# Altium PCB IMU.PcbDoc
Units mil, origin at the board's own origin, x right, y up, seen from the top; angles counter-clockwise.
Board outline 1287.4 x 2086.61 mil, 2 copper layers (Top Layer, Bottom Layer); 59 components, 83 nets, 241 pads, 231 vias.
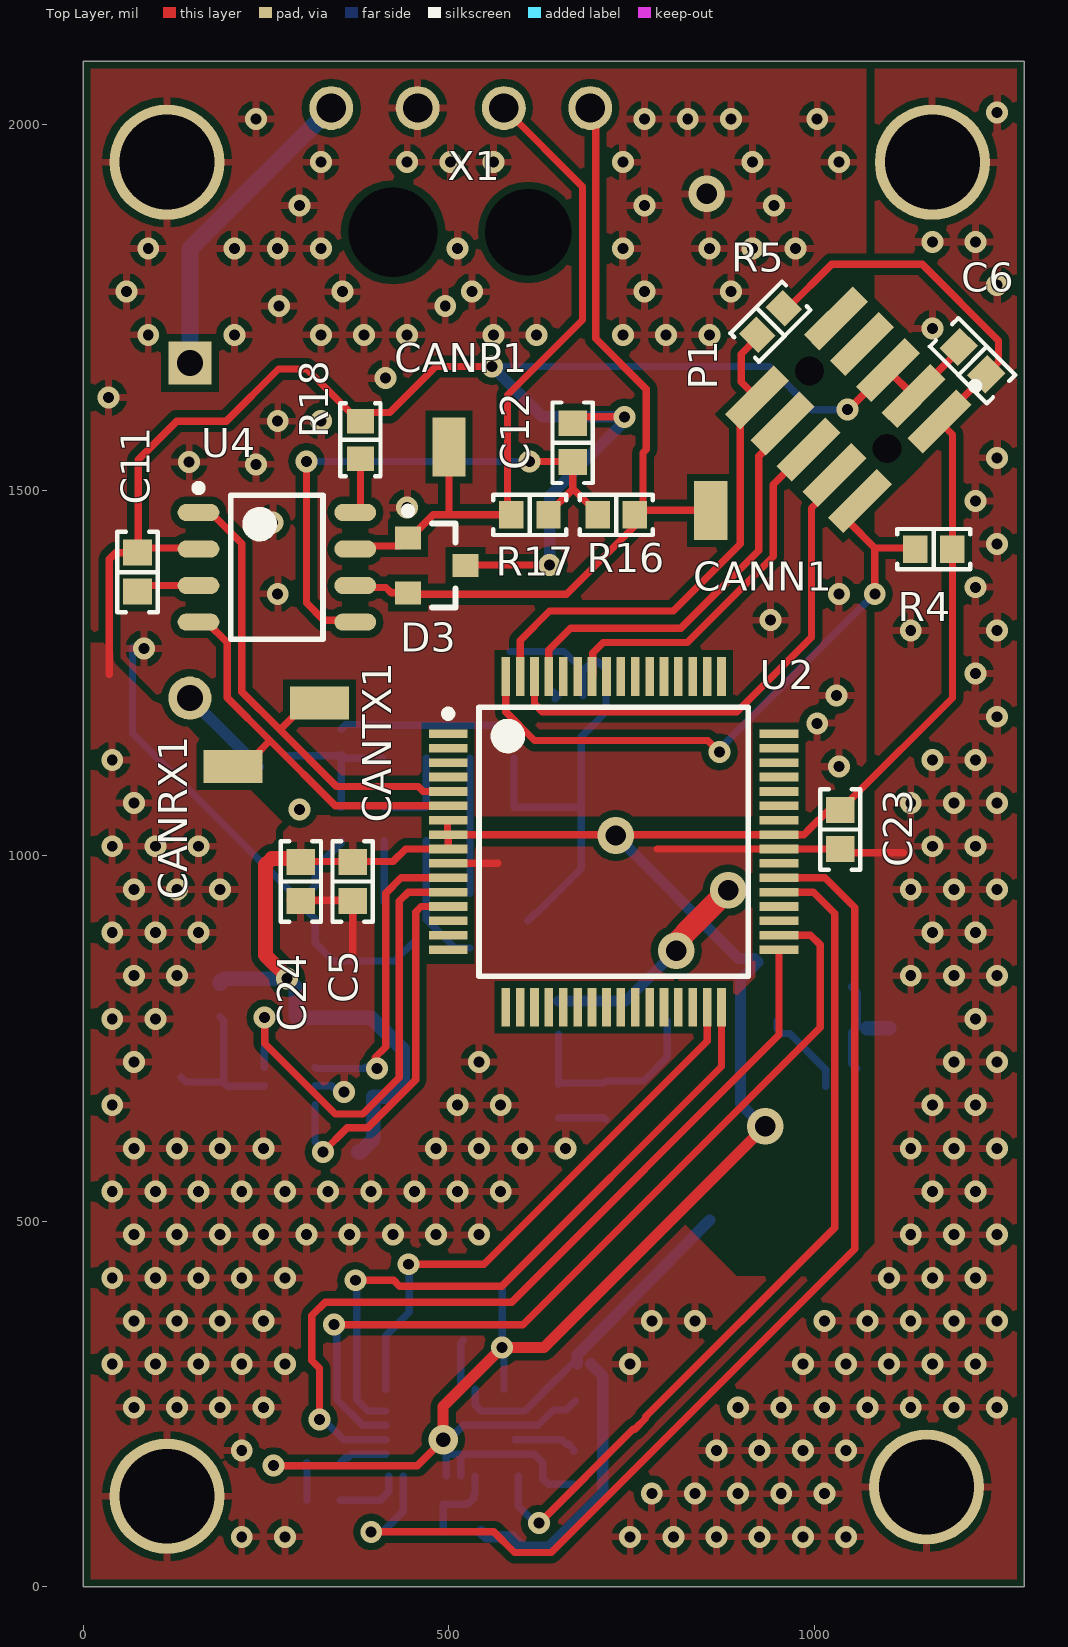
[diagram p0: Top Layer view]
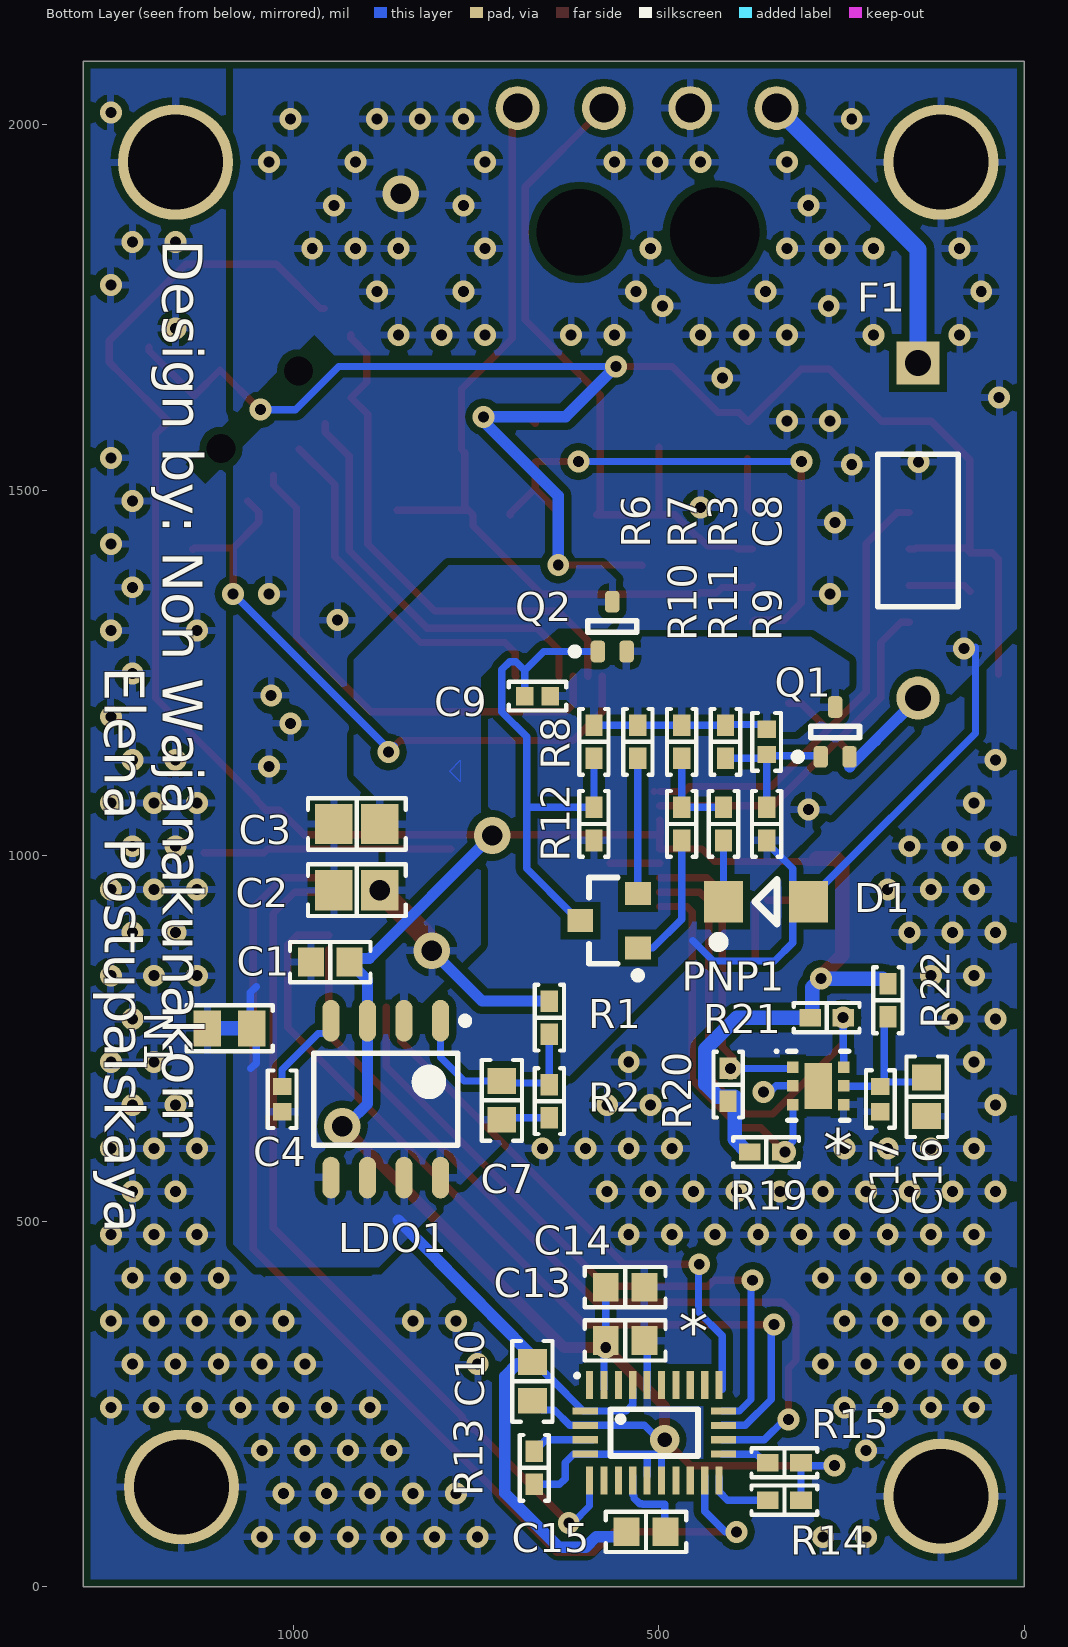
[diagram p1: Bottom Layer view, seen from below]

## Layer stack, top to bottom
Top Solder: solder mask 0.4, Solder Resist, Dk 3.5
Top Layer: signal copper 1.4
Dielectric 1: dielectric 12.6, FR-4, Dk 4.8
Bottom Layer: signal copper 1.4
Bottom Solder: solder mask 0.4, Solder Resist, Dk 3.5

## Board outline
1287.4,0 1287.4,2086.61 0,2086.61 0,0

## Design rules (kind name [scope] priority, off if disabled: settings)
BoardOutlineClearance [All] p1: gap=10 ignorepadtopadclearanceinfootprint=FALSE
Clearance [All] p1: gap=10 ignorepadtopadclearanceinfootprint=FALSE except(7.5: SMDPad-SMDPad; 8: Arc-Arc Arc-Track Arc-SMDPad Track-Track Track-SMDPad)
HoleSize [All] p1: absolutevalues=TRUE maxlimit=100 minlimit=10 maxpercent=80.000 minpercent=20.000
PolygonConnect [All] p1: connectstyle=Relief reliefconductorwidth=10 reliefentries=4 polygonreliefangle="90 Angle" airgapwidth=10
RoutingVias [All] p1: holewidth=15 width=30 viastyle="Through Hole" minholewidth=10 minwidth=20 maxholewidth=45 maxwidth=60
SilkToSilkClearance [All] p1: silktosilkclearance=0
SolderMaskExpansion [All] p1: expansion=4
Width [All] p1: maxlimit=50 minlimit=10 preferedwidth=10
28 further rules are at their usual default settings.

## Classes and differential pairs
component class U_MCU_MKE185F512VLH16: C5 C6 C23 C24 CANRX1 CANTX1 P1 R4 R5 U2
component class U_IC_BNO080: * C10 C13 C14 C15 R13 R14 R15
component class U_FUSE_RVP_OVP14V7: C8 C9 D1 F1 PNP1 Q1 Q2 R3 R6 R7 R8 R9 R10 R11 R12
component class U_CAN_Tranceiver: C11 C12 CANN1 CANP1 D3 R16 R17 R18 U4
component class U_3V3_LDO: C1 C2 C3 C4 C7 LDO1 R1 R2
component class IMU_BLOCK: * C16 C17 N1 R19 R20 R21 R22 X1

## Components (designator, comment, footprint, x,y, rotation, side; value= is the part's Value field where it differs from the comment)
* "TMP117" WSON-6 282.03,685.04 r180 bottom
* "BNO080" BNO080 506.36,210.63 r180 bottom value=Null
C1 "Capacitor MLCC 2.2uf 16V CAP 0603/1608" "CAP 0603/1608" 949.8,854.33 r180 bottom value=2.2uf
C2 "Capacitor MLCC 22uf 50V CAP 0805/2012" "CAP 0805/2012" 913.39,952.76 r180 bottom value=22uf
C3 "Capacitor MLCC 22uf 50V CAP 0805/2012" "CAP 0805/2012" 913.39,1043.31 r180 bottom value=22uf
C4 "Capacitor MLCC 470pf 25V CAP 0402/1005" "CAP 0402/1005" 1015.73,666.77 r90 bottom value=470pf
C5 "Capacitor MLCC 0.10uf 25V CAP 0603/1608" "CAP 0603/1608" 368.38,964.57 r90 top value=0.10uf
C6 "Capacitor MLCC 0.10uf 16V CAP 0603/1608" "CAP 0603/1608" 1216.54,1677.17 r315 top value=0.10uf
C7 "Capacitor MLCC 0.10uf 16V CAP 0603/1608" "CAP 0603/1608" 715,665.2 r90 bottom value=0.10uf
C8 "Capacitor MLCC 0.010uf 25V CAP 0402/1005" "CAP 0402/1005" 352.61,1155.71 r90 bottom value=0.010uf
C9 "Capacitor MLCC 0.010uf 25V CAP 0402/1005" "CAP 0402/1005" 666.26,1218.39 r180 bottom value=0.010uf
C10 "Capacitor MLCC 0.10uf 16V CAP 0603/1608" "CAP 0603/1608" 673.23,280.68 r270 bottom value=0.10uf
C11 "Capacitor MLCC 0.10uf 50V CAP 0603/1608" "CAP 0603/1608" 73.94,1387.96 r270 top value=0.10uf
C12 "Capacitor MLCC 4700pf 50V CAP 0603/1608" "CAP 0603/1608" 669.29,1565.01 r270 top value=4700pf
C13 "Capacitor MLCC 0.010uf 16V CAP 0603/1608" "CAP 0603/1608" 546.26,336.78 r0 bottom value=0.010uf
C14 "Capacitor MLCC 0.10uf 16V CAP 0603/1608" "CAP 0603/1608" 546.26,409.62 r0 bottom value=0.10uf
C15 "Capacitor MLCC 0.10uf 16V CAP 0603/1608" "CAP 0603/1608" 517.74,74.8 r180 bottom value=0.10uf
C16 "Capacitor MLCC 0.10uf 16V CAP 0603/1608" "CAP 0603/1608" 133.86,670.12 r90 bottom value=0.10uf
C17 "Capacitor MLCC 0.010uf 25V CAP 0402/1005" "CAP 0402/1005" 197.02,666.93 r90 bottom value=0.010uf
C23 "Capacitor MLCC 100pf 25V CAP 0603/1608" "CAP 0603/1608" 1035.43,1035.7 r90 top value=100pf
C24 "Capacitor MLCC 0.10uf 25V CAP 0603/1608" "CAP 0603/1608" 297.34,964.57 r90 top value=0.10uf
CANN1 "RCU-0C" RCU-0C 858.27,1472.44 r180 top (schematic designator TEST_CANN1)
CANP1 "RCU-0C" RCU-0C 500,1559.06 r180 top (schematic designator TEST_CANP1)
CANRX1 "RCU-0C" RCU-0C 204.72,1122.05 r90 top (schematic designator TEST_CANRX1)
CANTX1 "RCU-0C" RCU-0C 322.83,1208.66 r90 top (schematic designator TEST_CANTX1)
D1 "DDZ9701-7" SOD123F 353.61,936.92 r0 bottom value=14Vz
D3 "NUP2105LT1" "SOT-23 (TO-236)" 483.31,1396.94 r0 top value=TVS_24V
F1 "1A" PIN-W2/E2.8 145.58,1444.88 r270 bottom
LDO1 "MIC5209-3.3YM" SOIC-8 873.83,666.77 r270 bottom value="3.3V 500mA"
N1 "Net_Tie" Net_Tie 1087.49,763.78 r0 bottom
P1 "5103309-1" HDR2X5_SMT 1046.29,1610.24 r135 top value=CONN
PNP1 "2SB815-6-TB-E_PNP" SOT23-3 568.31,910.98 r0 bottom value="15V 0.7A"
Q1 "CMUDM8005 TR PFET" "CMUDM8005 TR SOT523" 258.94,1169.33 r90 bottom value=P_Channel
Q2 "CMUDM8005 TR PFET" "CMUDM8005 TR SOT523" 563.94,1313.39 r90 bottom value=P_Channel
R1 "Resistor 100k 0402 1/10W 1%" "RES 0402/1005" 650,778.31 r90 bottom value=100k
R2 "Resistor 100k 0402 1/10W 1%" "RES 0402/1005" 650,664.13 r90 bottom value=100k
R3 "Resistor 330k 0402 1/10W 1%" "RES 0402/1005" 408.94,1155.75 r90 bottom value=330k
R4 "Resistor 10k 0603 1/10W 1%" "RES 0603/1608" 1163.39,1419.37 r0 top value=10k
R5 "Resistor 10k 0603 1/10W 5%" "RES 0603/1608" 939.99,1730.62 r45 top value=10k
R6 "Resistor 300 0402 1/10W 1%" "RES 0402/1005" 528.94,1155.75 r90 bottom value=300
R7 "Resistor 100k 0402 1/10W 1%" "RES 0402/1005" 468.94,1155.75 r90 bottom value=100k
R8 "Resistor 330k 0402 1/10W 1%" "RES 0402/1005" 588.94,1155.75 r90 bottom value=330k
R9 "Resistor 100k 0402 1/10W 1%" "RES 0402/1005" 352.61,1043.39 r90 bottom value=100k
R10 "Resistor 300 0402 1/10W 1%" "RES 0402/1005" 468.94,1043.39 r90 bottom value=300
R11 "Resistor 300 0402 1/10W 1%" "RES 0402/1005" 411.68,1043.39 r90 bottom value=300
R12 "Resistor 100k 0402 1/10W 1%" "RES 0402/1005" 588.94,1043.39 r90 bottom value=100k
R13 "Resistor 10k 0402 1/10W 1%" "RES 0402/1005" 670.6,162.4 r270 bottom value=10k
R14 "Resistor 2.2k 0402 1/10W 1%" "RES 0402/1005" 328.33,118.11 r180 bottom value=2.2k
R15 "Resistor 2.2k 0402 1/10W 1%" "RES 0402/1005" 328.33,169.29 r180 bottom value=2.2k
R16 "Resistor 62 0603 1/10W 5%" "RES 0603/1608" 728.94,1466.42 r180 top value=62
R17 "Resistor 62 0603 1/10W 5%" "RES 0603/1608" 610.66,1466.42 r180 top value=62
R18 "Resistor 100 0603 1/10W 10%" "RES 0603/1608" 378.94,1568.95 r270 top value=100
R19 "Resistor 2.2k 0402 1/10W 1%" "RES 0402/1005" 353.35,594.49 r0 bottom value=2.2k
R20 "Resistor 2.2k 0402 1/10W 1%" "RES 0402/1005" 405.51,686.62 r270 bottom value=2.2k
R21 "Resistor 2.2k 0402 1/10W 1%" "RES 0402/1005" 270.53,778.3 r0 bottom value=2.2k
R22 "Resistor 300 0402 1/10W 1%" "RES 0402/1005" 186.71,802.17 r90 bottom value=300
U2 "" TQFP64 725.38,1018.97 r0 top
U4 "MCP2561 CAN Transceiver" SOIC-8 264.64,1394.54 r0 top value=CAN/UART
X1 "43650-0402" Molex_43650_0402 339.04,2022.96 r270 top value=CONN

## Footprints (in the part's own frame and the unit in brackets; to place one, negate y for a bottom-side part, rotate by r counter-clockwise, add the part's x,y. Pads: shape width x height; smd on the part's side, far side on the other; paste and mask are expansions set on the pad)
BNO080 [mm]
  rect 0.25x0.975 smd: 1(-2.25,1.658) 6(-2.25,-1.66) 7(-1.75,-1.66) 8(-1.25,-1.66) 9(-0.75,-1.66) 10(-0.25,-1.66) 11(0.25,-1.66) 12(0.75,-1.66) 13(1.25,-1.66) 14(1.75,-1.66) 15(2.25,-1.66) 20(2.25,1.658) 21(1.75,1.658) 22(1.25,1.658) 23(0.75,1.658) 24(0.25,1.658) 25(-0.25,1.658) 26(-0.75,1.658) 27(-1.25,1.658) 28(-1.75,1.658)
  rect 0.875x0.25 smd: 2(-2.4,0.75) 3(-2.4,0.25) 4(-2.4,-0.25) 5(-2.4,-0.75) 16(2.4,-0.75) 17(2.4,-0.25) 18(2.4,0.25) 19(2.4,0.75)
  silkscreen extent -2.7,-0.81 1.52,1.99, body extent -2.6,-1.9 2.6,1.9, height 1.18
"CAP 0402/1005" [mm] "Chip Capacitor, 2-Leads, Body 1.02x0.51mm, IPC Medium Density"
  rect 0.6x0.64 smd: 1(-0.44,0) 2(0.44,0)
  silkscreen extent -1,-0.5 1,0.5, body extent -0.5,-0.26 0.5,0.26, height 0.52
"CAP 0603/1608" [mm] "Chip Capacitor, 2-Leads, Body 1.60x0.80mm, IPC Medium Density"
  rect 0.9x1 smd: 1(-0.675,0) 2(0.675,0)
  silkscreen extent -1.4,-0.7 1.4,0.7, body extent -0.8,-0.41 0.8,0.41, height 0.82
"CAP 0805/2012" [mm] "Chip Capacitor, 2-Leads, Body 2.00x1.20mm, IPC Medium Density"
  rect 1.3x1.4 smd: 1(-0.8,0) 2(0.8,0)
  silkscreen extent -1.7,-0.9 1.7,0.9, body extent -1,-0.64 1,0.64, height 1.26
"CMUDM8005 TR SOT523" [mm] "SOT523, 3-Leads, Body 1.60x1.60mm (avg), Pitch 1.00mm, IPC Medium Density"
  rrect50% 0.75x0.5 smd: 1(-0.865,0.5) 2(-0.865,-0.5) 3(0.865,0)
  silkscreen extent -0.99,-0.85 0.2,1.43, body extent -0.49,-0.85 0.49,0.85, height 0.78
HDR2X5_SMT [mm] "Header, 10-Leads, Body 3.43x6.35mm, Pitch 1.27mm"
  rect 0.76x2.4 smd: 1(-2.54,-1.95) 2(-2.54,1.95) 3(-1.27,-1.95) 4(-1.27,1.95) 5(0,-1.95) 6(0,1.95) 7(1.27,-1.95) 8(1.27,1.95) 9(2.54,-1.95) 10(2.54,1.95)
  round 0 hole 1 unplated: MH1(-1.905,0) MH2(1.905,0)
  silkscreen extent -2.66,-3.82 -2.42,-3.58, body extent -3.18,-1.72 3.18,1.72, height 4.55
Molex_43650_0402 [mm]
  round 1.524 hole 1.02: 1(0,0) 2(0,3) 3(0,6) 4(0,9)
  round 0 hole 3: 5(4.32,6.85)
  round 0 hole 3.1: 5(4.32,2.15)
  body extent -1.15,-3.32 8.75,12.33, height 5.57
Net_Tie [mm] "Chip Resistor, 2-Leads, Body 2.00x1.25mm, IPC High Density"
  rect 0.95x1.25 smd: 1(-0.775,0) 2(0.775,0)
  Top Layer lines w0.5: -0.381,0 0.381,0
  silkscreen extent -1.5,-0.8 1.5,0.8
PIN-W2/E2.8 [mm] "Thru-Hole; 2 Leads"
  rect 1.5x1.5 hole 0.9: 1(-5.825,0)
  round 1.5 hole 0.9: 2(5.825,0)
  silkscreen extent -2.65,-1.4 2.65,1.4
RCU-0C [mm]
  rect 1.15x2.05 smd: 1(0,0)
  body extent -0.6,-0.77 0.6,0.82, height 1.16
"RES 0402/1005" [mm] "Chip Resistor, 2-Leads, Body 1.0x0.5mm, IPC Medium Density"
  rect 0.75x0.6 smd: 1(-0.575,0) 2(0.575,0)
  silkscreen extent -1.14,-0.51 1.14,0.51, body extent -0.5,-0.25 0.5,0.25, height 0.35
"RES 0603/1608" [mm] "Chip Resistor, 2-Leads, Body 1.60x0.80mm, IPC Medium Density"
  rect 0.85x0.95 smd: 1(-0.65,0) 2(0.65,0)
  silkscreen extent -1.27,-0.7 1.27,0.7, body extent -0.8,-0.4 0.8,0.4, height 0.45
SOD123F [mm] "SODFL, 2-Leads, Body 1.80x3.50mm, IPC Low Density"
  rect 1.35x1.45 smd: 1(-1.475,0) 2(1.475,0)
  silkscreen extent -0.38,-0.76 1.75,1.5, body extent -1.75,-0.95 1.75,0.95, height 1.15
SOIC-8 [mm] "SOIC, 8-Leads, Body 4.90x3.90mm, Pitch 1.27mm, IPC Medium Density"
  oval 1.45x0.6 smd: 1(-2.725,1.905) 2(-2.725,0.635) 3(-2.725,-0.635) 4(-2.725,-1.905) 5(2.725,-1.905) 6(2.725,-0.635) 7(2.725,0.635) 8(2.725,1.905)
  silkscreen extent -2.85,-2.5 1.6,2.88, body extent -3,-2.5 3,2.5, height 1.75
SOT23-3 [mm] "SOT23, 3-Leads, Body 2.92x2.37mm, Pitch 0.95mm, IPC Medium Density, NUP2105L"
  rect 0.9x0.8 smd: 1(-1,0.95) 2(-1,-0.95) 3(1,0)
  silkscreen extent -1.12,-1.5 0.7,2.02, body extent -0.7,-1.52 0.7,1.52, height 1.11
"SOT-23 (TO-236)" [mm]
  rect 0.9x0.8 smd: 1(-1,0.95) 2(-1,-0.95) 3(1,0)
  silkscreen extent -1.12,-1.46 0.65,2.02, body extent -0.65,-1.46 0.65,1.46, height 1.11
TQFP64 [mm] "TSQFP, 64-Leads, Body 10.00x10.00mm, Pitch 0.50mm, IPC Medium Density, MKE18F512VLH16"
  rect 1.35x0.3 smd: 1(-5.75,3.75) 2(-5.75,3.25) 3(-5.75,2.75) 4(-5.75,2.25) 5(-5.75,1.75) 6(-5.75,1.25) 7(-5.75,0.75) 8(-5.75,0.25) 9(-5.75,-0.25) 10(-5.75,-0.75) 11(-5.75,-1.25) 12(-5.75,-1.75) 13(-5.75,-2.25) 14(-5.75,-2.75) 15(-5.75,-3.25) 16(-5.75,-3.75) 33(5.75,-3.75) 34(5.75,-3.25) 35(5.75,-2.75) 36(5.75,-2.25) 37(5.75,-1.75) 38(5.75,-1.25) 39(5.75,-0.75) 40(5.75,-0.25) 41(5.75,0.25) 42(5.75,0.75) 43(5.75,1.25) 44(5.75,1.75) 45(5.75,2.25) 46(5.75,2.75) 47(5.75,3.25) 48(5.75,3.75)
  rect 0.3x1.35 smd: 17(-3.75,-5.75) 18(-3.25,-5.75) 19(-2.75,-5.75) 20(-2.25,-5.75) 21(-1.75,-5.75) 22(-1.25,-5.75) 23(-0.75,-5.75) 24(-0.25,-5.75) 25(0.25,-5.75) 26(0.75,-5.75) 27(1.25,-5.75) 28(1.75,-5.75) 29(2.25,-5.75) 30(2.75,-5.75) 31(3.25,-5.75) 32(3.75,-5.75) 49(3.75,5.75) 50(3.25,5.75) 51(2.75,5.75) 52(2.25,5.75) 53(1.75,5.75) 54(1.25,5.75) 55(0.75,5.75) 56(0.25,5.75) 57(-0.25,5.75) 58(-0.75,5.75) 59(-1.25,5.75) 60(-1.75,5.75) 61(-2.25,5.75) 62(-2.75,5.75) 63(-3.25,5.75) 64(-3.75,5.75)
  silkscreen extent -5.87,-4.67 4.67,4.68, body extent -5,-5 5,5, height 1.6
WSON-6 [mm] "WSON, 6-Leads, Body 2.00x2.00mm, Pitch 0.65mm, Thermal Pad 1.60x0.96mm, IPC Medium Density"
  rect 0.4x0.4 smd: 1(-0.88,0.65) 2(-0.88,0) 3(-0.88,-0.65) 4(0.88,-0.65) 5(0.88,0) 6(0.88,0.65)
  rect 0.96x1.6 smd: 7(0,0)
  silkscreen extent -1.5,-1.2 1.05,1.25, body extent -1.05,-1.05 1.05,1.05, height 0.8

## Part data
*: library part 5, "Temperature Sensor Digital, Local -55°C ~ 150°C 16 b 6-WSON (2x2)", Manufacturer_id=1, MfrPartNo=TMP117MAIDRVT, Package=WSON-6, Created_By="Non Wajanakunakorn", Drawer_id=1, idADC=5, Link=https://www.digikey.com/product-detail/en/texas-instruments/TMP117MAIDRVT/296-52215-1-ND/9749243
*: library part 33, "Accelerometer, Gyroscope, Magnetometer, 9 Axis Sensor", Manufacturer_id=1, Package=28-TFLGA, ComponentLink1Description=datasheet, ComponentLink1URL=https://cdn.sparkfun.com/assets/1/3/4/5/9/BNO080_Datasheet_v1.3.pdf, Created_By=Null, Data_Rate=Null, Drawer_id=1, idIC_Misc=33, MfrPartNo=BNO080, Name=BNO080, Num_Circuits=1, Protocol=Null, Supplier1=Digi-Key, Supplier1PartNo=https://www.digikey.com/product-detail/en/hillcrest-laboratories-inc/BNO080/1888-1000-1-ND/7917169, Type="9dof IC Sensor", Updated_By=Null, Vin(Max)=3.6V, Vin(Min)="1.7V for IO, 2.4V for sensors"
C1: library part 231, Dielectric=Ceramic, Manufacturer_id=1, Package="CAP 0603/1608", Voltage_Rating=16V, Created_By="Nick Mah", Created_Date=10/20/2018, Drawer_id=1, idCapacitor=231, Name="Cap_2.2uf_16V_CAP 0603/1608"
C2 C3: library part 1077, Dielectric=Ceramic, Manufacturer_id=1, Package="CAP 0805/2012", Voltage_Rating=50V, Created_By="Nick Mah", Created_Date=10/20/2018, Drawer_id=1, idCapacitor=1077, Name="Cap_22uf_50V_CAP 0805/2012"
C4: library part 425, Dielectric=Ceramic, Manufacturer_id=1, Package="CAP 0402/1005", Voltage_Rating=25V, Created_By="Nick Mah", Created_Date=10/20/2018, Drawer_id=1, idCapacitor=425, Name="Cap_470pf_25V_CAP 0402/1005"
C5 C24: library part 583, Dielectric=Ceramic, Manufacturer_id=1, Package="CAP 0603/1608", Voltage_Rating=25V, Created_By="Nick Mah", Created_Date=10/20/2018, Drawer_id=1, idCapacitor=583, Name="Cap_0.10uf_25V_CAP 0603/1608"
C6 C7 C10 C14 C15 C16: library part 223, Dielectric=Ceramic, Manufacturer_id=1, Package="CAP 0603/1608", Voltage_Rating=16V, Created_By="Nick Mah", Created_Date=10/20/2018, Drawer_id=1, idCapacitor=223, Name="Cap_0.10uf_16V_CAP 0603/1608"
C8 C9 C17: library part 457, Dielectric=Ceramic, Manufacturer_id=1, Package="CAP 0402/1005", Voltage_Rating=25V, Created_By="Nick Mah", Created_Date=10/20/2018, Drawer_id=1, idCapacitor=457, Name="Cap_0.010uf_25V_CAP 0402/1005"
C11: library part 943, Dielectric=Ceramic, Manufacturer_id=1, Package="CAP 0603/1608", Voltage_Rating=50V, Created_By="Nick Mah", Created_Date=10/20/2018, Drawer_id=1, idCapacitor=943, Name="Cap_0.10uf_50V_CAP 0603/1608"
C12: library part 929, Dielectric=Ceramic, Manufacturer_id=1, Package="CAP 0603/1608", Voltage_Rating=50V, Created_By="Nick Mah", Created_Date=10/20/2018, Drawer_id=1, idCapacitor=929, Name="Cap_4700pf_50V_CAP 0603/1608"
C13: library part 217, Dielectric=Ceramic, Manufacturer_id=1, Package="CAP 0603/1608", Voltage_Rating=16V, Created_By="Nick Mah", Created_Date=10/20/2018, Drawer_id=1, idCapacitor=217, Name="Cap_0.010uf_16V_CAP 0603/1608"
C23: library part 529, Dielectric=Ceramic, Manufacturer_id=1, Package="CAP 0603/1608", Voltage_Rating=25V, Created_By="Nick Mah", Created_Date=10/20/2018, Drawer_id=1, idCapacitor=529, Name="Cap_100pf_25V_CAP 0603/1608"
CANN1 CANP1 CANRX1 CANTX1: library part 5, Manufacturer_id=1, Package=0603, ComponentLink1Description=Datasheet, ComponentLink1URL=https://www.te.com/commerce/DocumentDelivery/DDEController?Action=srchrtrv&DocNm=1773266&DocType=DS&DocLang=English, Drawer_id=1, idTable=5, Link=https://www.digikey.com/product-detail/en/te-connectivity-amp-connectors/RCU-0C/A106145CT-ND/3477802, MfrPartNo=RCU-0C, Name=RCU-0C_Test_Point
D1: library part 10, "Zener Diode 14V 500mW ±5% Surface Mount SOD-123", Manufacturer_id=8, Package=SOD-123, Power=500mW, Supplier1PartNo=DDZ9701-7DICT-ND, ComponentLink1Description=Datasheet, ComponentLink1URL=https://www.diodes.com/assets/Datasheets/ds30410.pdf, Drawer_id=1, idDiode=10, Link=https://www.digikey.com/product-detail/en/diodes-incorporated/DDZ9701-7/DDZ9701-7DICT-ND/3877402, MfrPartNo=DDZ9701-7, Name=DDZ9701, Num_Circuits=1, Supplier1=Digi-Key, Type=Zener
D3: library part 6, "ESD Protection Diode", Manufacturer_id=1, MfrPartNo=NUP2105LT1-ND, Package=SOT-23, Power=350W, Drawer_id=1, Ic=8A, idDiode=6, Link=https://www.digikey.com/product-detail/en/on-semiconductor/NUP2105LT1/NUP2105LT1-ND/1485000, Name=SOT-23_350W_Zener, Num_Circuits=1, Type=Zener
F1: library part 5, "Fuse", Manufacturer_id=1, MfrPartNo=1206L050/15YR, Created_By=Angel, Created_Date=10/27/2018, Drawer_id=1, I_hold=500mA, I_max=100A, I_trip=1A, idFuse=5, LatestRevisionDate=17-Jul-2002, LatestRevisionNote="Re-released for DXP Platform.", Link=https://www.digikey.com/product-detail/en/littelfuse-inc/1206L050-15YR/F3733CT-ND/2486168, Name="PTC Poly Fuse Resettable", PackageDescription="Thru-Hole; 2 Leads", PackageReference=PIN-W2/E2.8, Pd_Typ=600mW, Published=8-Jun-2000, Publisher="Altium Limited", V_max=15V
LDO1: library part 2, "IC REG LINEAR 3.3V 500MA 8SOIC", Current_Rating=500mA, Manufacturer_id=1, MfrPartNo=MIC5209-3.3YM-TRYM, Package=SOIC-8, Drawer_id=1, idPMIC_SW=2, Link=https://www.digikey.com/product-detail/en/microchip-technology/MIC5209-3.3YM-TR/MIC5209-3.3YM-CT-ND/7916551, Name="MIC5209-3.3YM 3.3V 500mA LDO", Num_Outputs=1, Output_Config=Fixed, Vin(Max)=16V, Vin(Min)=2.5V, Vout(Max)=3.3V, Vout(Min)=3.3v
N1 U2: library part 1, Drawer_id=1, Manufacturer_id=1
  N1: idFuse=3, idShunt=1, Name="Net Tie"
  U2: idMCU=1, Name="MKE18F512VLH16 MCU"
P1: library part 4, "2 row connector", Manufacturer_id=1, Voltage_Rating=None, ComponentLink1Description=Datasheet, Created_By=Aiku, Drawer_id=1, idConn=4, Link=https://www.digikey.com/product-detail/en/5103309-1/A33160-ND/1114898?utm_campaign=buynow&WT.z_cid=ref_octopart_dkc_buynow&utm_medium=aggregator&curr=usd&site=us&utm_source=octopart, MfrPartNo=5103309-1, Name=CONN_TE_2X5POS, Num_Contacts=10, Num_Rows=2, Pitch=2.54mm
PNP1: library part 8, "TRANS PNP 15V 0.7A CP", Manufacturer_id=1, MfrPartNo=2SB815-6-TB-E, Package="SMT 3-CP", Power=Null, Supplier1PartNo=2SB815-6-TB-EOSCT-ND, ComponentLink1Description=datasheet, ComponentLink1URL=https://www.onsemi.com/pub/Collateral/EN694-D.PDF, Created_By=None, Created_Date=3/2/2019, Drawer_id=1, hFE=200-400, Ic=0.7A, idBJT=8, Link=https://www.digikey.com/product-detail/en/on-semiconductor/2SB815-6-TB-E/2SB815-6-TB-EOSCT-ND/8538307, Name="2SB815-6-TB-E PNP", Num_Circuits=1, Supplier1=Digi-Key, Type=PNP, Updated_By=Null, Vce(Max)=15V
Q1 Q2: library part 13, "MOSFET P-CH 20V 650MA SOT523", Manufacturer_id=1, MfrPartNo="CMUDM8005 TR", Package=SOT-523, Power(Max)=300mW, Supplier1PartNo=CMUDM8005CT-ND, ComponentLink1Description=datasheet, ComponentLink1URL=https://my.centralsemi.com/get_document.php?cmp=1&mergetype=pd&mergepath=pd&pdf_id=CMUDM8005.PDF, Created_By=Null, Created_Date=3/2/2019, Drawer_id=1, Id=650mA, idFETs=13, Link=https://www.digikey.com/product-detail/en/central-semiconductor-corp/CMUDM8005-TR/CMUDM8005CT-ND/5324590, Name="CMUDM8005 TR PFET", Num_Circuits=1, Rds_On=360m, Supplier1=Digi-Key, Updated_By=Null, Vdss=20V, Vgs(Max)=8V, Vgs(typ)=Null
R1 R2 R7 R9 R12: library part 121, Manufacturer_id=1, Package=0402, Power=1/10W, Tolerance=1%, ComponentLink1Description=Datasheet, Created_By="Nick Mah", Created_Date=2018-10-20, Drawer_id=1, idResistor=121, Name=Res_100k_0402_1/10W_1%, Supplier 1=Digi-Key
R3 R8: library part 133, Manufacturer_id=1, Package=0402, Power=1/10W, Tolerance=1%, ComponentLink1Description=Datasheet, Created_By="Nick Mah", Created_Date=2018-10-20, Drawer_id=1, idResistor=133, Name=Res_330k_0402_1/10W_1%, Supplier 1=Digi-Key
R4: library part 313, Manufacturer_id=1, Package=0603, Power=1/10W, Tolerance=1%, ComponentLink1Description=Datasheet, Created_By="Nick Mah", Created_Date=2018-10-20, Drawer_id=1, idResistor=313, Name=Res_10k_0603_1/10W_1%, Supplier 1=Digi-Key
R5: library part 1393, Manufacturer_id=1, Package=0603, Power=1/10W, Tolerance=5%, ComponentLink1Description=Datasheet, Created_By="Nick Mah", Created_Date=2018-10-20, Drawer_id=1, idResistor=1393, Name=Res_10k_0603_1/10W_5%, Supplier 1=Digi-Key
R6 R10 R11 R22: library part 60, Manufacturer_id=1, Package=0402, Power=1/10W, Tolerance=1%, ComponentLink1Description=Datasheet, Created_By="Nick Mah", Created_Date=2018-10-20, Drawer_id=1, idResistor=60, Name=Res_300_0402_1/10W_1%, Supplier 1=Digi-Key
R13: library part 97, Manufacturer_id=1, Package=0402, Power=1/10W, Tolerance=1%, ComponentLink1Description=Datasheet, Created_By="Nick Mah", Created_Date=2018-10-20, Drawer_id=1, idResistor=97, Name=Res_10k_0402_1/10W_1%, Supplier 1=Digi-Key
R14 R15 R19 R20 R21: library part 81, Manufacturer_id=1, Package=0402, Power=1/10W, Tolerance=1%, ComponentLink1Description=Datasheet, Created_By="Nick Mah", Created_Date=2018-10-20, Drawer_id=1, idResistor=81, Name=Res_2.2k_0402_1/10W_1%, Supplier 1=Digi-Key
R16 R17: library part 1340, Manufacturer_id=1, Package=0603, Power=1/10W, Tolerance=5%, ComponentLink1Description=Datasheet, Created_By="Nick Mah", Created_Date=2018-10-20, Drawer_id=1, idResistor=1340, Name=Res_62_0603_1/10W_5%, Supplier 1=Digi-Key
R18: library part 2293, Manufacturer_id=1, Package=0603, Power=1/10W, Tolerance=10%, ComponentLink1Description=Datasheet, Created_By="Nick Mah", Created_Date=2018-10-20, Drawer_id=1, idResistor=2293, Name=Res_100_0603_1/10W_10%, Supplier 1=Digi-Key
U4: library part 5, Manufacturer_id=1, MfrPartNo=MCP2561, Package=SOIC-8, Created_By="Angel Delgado", Data_Rate=1Mbps, Drawer_id=1, idIC_Interface=5, Link=https://www.digikey.com/product-detail/en/microchip-technology/MCP2561T-E-SN/MCP2561T-E-SNCT-ND/5148846, Name="CAN Transceiver", Num_Circuits=1, Protocol=CAN, Type=Transceiver, Vin(Max)=5.5V, Vin(Min)=4.5V
X1: library part 6, Manufacturer_id=4, Package=Conn, Supplier1PartNo=WM11252-ND, Voltage_Rating=600V, ComponentLink1Description=Datasheet, ComponentLink1URL=https://www.mouser.com/datasheet/2/276/0436500402_PCB_HEADERS-148886.pdf, Created_By=Nick, Drawer_id=1, idConn=6, Link=https://www.digikey.com/product-detail/en/molex-llc/0436500402/WM11252-ND/3310554, MfrPartNo=43650-0402, Name="Molex 43650_0402", Num_Contacts=4, Num_Rows=1, Pitch=3mm, Supplier1=Digi-Key

## Free pads (board coordinates)
  round 157.48 hole 129.92: 1(114.17,123.48) 2(1153.54,136.13) 3(114.17,1948.82) 4(1161.42,1948.82)

## Via types
v1: diameter 30, hole 15, Top Layer to Bottom Layer, 225 vias
v2: diameter 50, hole 28, Top Layer to Bottom Layer, 5 vias
v3: diameter 40, hole 20, Top Layer to Bottom Layer, 1 vias

## Nets (pads, with @x,y where several pads share a name; then routed paths per layer and width w, separated by ;. In a path a pad name is that pad's centre, name@x,y a point inside that pad or via, vN(x,y) a via of type N, cw(c..) or ccw(c..) an arc to the next point about the centre after c; other vN are vias at no path point)
AGND: *.2@316.67,685.04 *.4@247.38,659.45 *.25 C5.1 C6.1 C11.1 C12.1 C13.1 C14.1 C16.1 C17.1 C23.1 C24.1 D3.3 N1.2 P1.3 P1.5 pad.1 pad.2 pad.4 R18.1 U2.10 U2.40 U4.2 | length 3049.3
  Top Layer w10: 35.43,1248.03 35.43,1405.65 44.32,1414.54 C11.1 C11.1@74.8,1415.4 ; U4.2 149.61,1419.54 148.2,1420.94 80.34,1420.94 C11.1@74.8,1415.4 ; C24.1@282.76,938.98 C5.1@351.03,938.98 ; 368.38,861.22 C5.1 ; U2.10 566.86,989.44 ; D3.3 523.37,1397.64 v1(637.79,1397.64) ; v1(559.06,1669.29) 481.99,1669.29 418.97,1606.27 390.67,1606.27 R18.1 376.97,1594.54 305.52,1665.98 266.9,1665.98 195.4,1594.49 127.53,1594.49 74.8,1541.76 C11.1@74.8,1415.4 ; C12.1 678.18,1600.47 v1(740.16,1600.47) ; 784.71,1009.12 U2.40 C23.1 1040.62,1003.94 1122.05,1003.94 ; v1(1045.33,1610.24) 1046.29,1610.24 P1.5 P1.3 1197.74,1690.98 C6.1
  Bottom Layer w10: *.2@316.67,685.04 317.07,684.65 317.46,685.04 339.79,685.04 348.35,676.48 v1(356.72,676.48) ; *.25@516.2,270 516.2,333.3 C13.1 ; v1(559.06,1669.29) 938.18,1669.29 997.23,1610.24 v1(1045.33,1610.24) ; v1@740.16,1594.49 v1(740.16,1600.47)
  Bottom Layer w15.75: v1(559.06,1669.29) 627.87,1600.47 v1(740.16,1600.47) ; v1(637.79,1397.64) 637.79,1492.12 v1@740.16,1594.49
  other v1: 216.54,67.99 275.59,67.99 748.03,67.99 807.09,67.99 866.14,67.99 925.2,67.99 984.25,67.99 1043.31,67.99 777.56,127.05 836.61,127.05 895.67,127.05 954.72,127.05 1013.78,127.05 216.54,186.1 866.14,186.1 925.2,186.1 984.25,186.1 1043.31,186.1 68.9,245.16 127.95,245.16 187.01,245.16 246.06,245.16 895.67,245.16 954.72,245.16 1013.78,245.16 1072.83,245.16 1131.89,245.16 1190.94,245.16 1250,245.16 39.37,304.21 98.43,304.21 157.48,304.21 216.54,304.21 275.59,304.21 748.03,304.21 984.25,304.21 1043.31,304.21 1102.36,304.21 1161.42,304.21 1220.47,304.21 68.9,363.27 127.95,363.27 187.01,363.27 246.06,363.27 777.56,363.27 836.61,363.27 1013.78,363.27 1072.83,363.27 1131.89,363.27 1190.94,363.27 1250,363.27 39.37,422.32 98.43,422.32 157.48,422.32 216.54,422.32 275.59,422.32 1102.36,422.32 1161.42,422.32 1220.47,422.32 68.9,481.38 127.95,481.38 187.01,481.38 246.06,481.38 305.12,481.38 364.17,481.38 423.23,481.38 482.28,481.38 541.34,481.38 1131.89,481.38 1190.94,481.38 1250,481.38 39.37,540.43 98.43,540.43 157.48,540.43 216.54,540.43 275.59,540.43 334.65,540.43 393.7,540.43 452.76,540.43 511.81,540.43 570.87,540.43 1161.42,540.43 1220.47,540.43 68.9,599.49 127.95,599.49 187.01,599.49 246.06,599.49 482.28,599.49 541.34,599.49 600.39,599.49 659.45,599.49 1131.89,599.49 1190.94,599.49 1250,599.49 39.37,658.54 511.81,658.54 570.87,658.54 1161.42,658.54 1220.47,658.54 68.9,717.6 541.34,717.6 1190.94,717.6 1250,717.6 39.37,776.65 98.43,776.65 1220.47,776.65 68.9,835.71 127.95,835.71 1131.89,835.71 1190.94,835.71 1250,835.71 39.37,894.76 98.43,894.76 157.48,894.76 1161.42,894.76 1220.47,894.76 68.9,953.82 127.95,953.82 187.01,953.82 1131.89,953.82 1190.94,953.82 1250,953.82 39.37,1012.87 98.43,1012.87 157.48,1012.87 1161.42,1012.87 1220.47,1012.87 68.9,1071.93 1131.89,1071.93 1190.94,1071.93 1250,1071.93 39.37,1130.98 1161.42,1130.98 1220.47,1130.98 1250,1190.04 1220.47,1249.09 1131.89,1308.15 1250,1308.15 1220.47,1367.2 1250,1426.26 1220.47,1485.31 1250,1544.37 1161.42,1721.54 1250,1780.59 1161.42,1839.65 1220.47,1839.65 1250,2016.81
ALERT: *.3@316.67,659.45 R19.1 U2.13 | length 517.4
  Top Layer w10: v1(327.76,594.49) 360.94,627.67 388.73,627.67 454.42,693.36 454.42,922.97 461.84,930.38 U2.13
  Bottom Layer w10: *.3@316.67,659.45 316.67,609.16 320.95,604.89 320.95,601.3 v1(327.76,594.49) R19.1
CAN_N: CANN1.1 D3.2 R16.1 U4.6 X1.4 | length 1142.5
  Top Layer w10: U4.6 374.53,1366.93 413.87,1366.93 421.26,1359.54 D3.2 445.84,1357.64 660.78,1357.64 754.53,1451.38 R16.1 ; X1.4 700.78,2015.55 700.78,1707.58 770.16,1638.2 770.16,1555.83 765.65,1551.33 765.65,1477.54 R16.1 ; CANN1.1 760.55,1472.44 R16.1
CAN_P: CANP1.1 D3.1 R17.2 U4.7 X1.3 | length 970.8
  Top Layer w10: U4.7 392.34,1419.54 396.39,1423.59 433.19,1423.59 D3.1 446.39,1434.34 478.46,1466.42 500,1466.42 ; CANP1.1 500,1466.42 ; X1.3 682.78,1915.44 682.78,1732.87 580.24,1630.33 580.24,1471.25 R17.2 500,1466.42
GND: *.2@600.85,240.16 *.26 C1.1 C2.1 C3.1 C4.1 C7.1 C10.1 C15.1 D1.1 LDO1.5 LDO1.6 LDO1.7 LDO1.8 N1.1 pad.3 R2.1 R9.1 R12.1 X1.2 | length 1811.2
  Bottom Layer w10: 66.93,1285.48 66.93,1167.5 295.54,938.89 D1.1 317.12,958.49 317.12,982.3 352.61,1017.8 R9.1 ; D1.1@295.54,934.95 317.12,913.38 317.12,880.61 341.9,855.83 425.63,855.83 453.82,884.02 ; *.26@535.89,270 535.97,269.92 535.97,248.62 544.43,240.16 590.55,240.16 590.63,240.24 603.57,240.24 648.16,284.82 648.83,284.82 671.26,307.25 C10.1 ; R2.1 712.13,641.5 C7.1 ; 1051.18,820.72 1059.06,812.85 1059.06,765.86 N1.1 1051.18,757.99 1051.18,715.87 1058.39,708.66
  Bottom Layer w15.75: C15.1 550.82,68.3 585.66,68.3 600.22,53.74 637.02,53.74 710.79,127.5 710.79,287.88 693.99,304.68 ; C10.1@675.81,304.68 675.76,307.3 675.59,316.98 856.89,501.42
  other v1: 295.28,1062.99 1033.46,1122.05 1003.94,1181.1 1030.54,1219.38 82.68,1283.46 939.99,1322.14 265.75,1358.27 1033.46,1358.27 258.89,1456.03 442.91,1476.38 236.22,1535.43 144.62,1538.44 265.75,1594.49 324.8,1594.49 34.48,1626.66 413.39,1653.54 88.58,1712.6 206.69,1712.6 324.8,1712.6 383.86,1712.6 442.91,1712.6 561.02,1712.6 620.08,1712.6 738.19,1712.6 797.24,1712.6 856.3,1712.6 267.74,1751.97 494.96,1751.97 59.06,1771.65 354.33,1771.65 531.5,1771.65 767.72,1771.65 885.83,1771.65 88.58,1830.71 206.69,1830.71 265.75,1830.71 324.8,1830.71 511.81,1830.7 738.19,1830.71 856.3,1830.71 915.35,1830.71 974.41,1830.71 295.28,1889.76 767.72,1889.76 944.88,1889.76 324.8,1948.82 442.91,1948.82 501.97,1948.82 561.02,1948.82 738.19,1948.82 915.35,1948.82 1033.46,1948.82 236.22,2007.87 767.72,2007.87 826.77,2007.87 885.83,2007.87 1003.94,2007.87
  other v2: 853.07,1905.51
JTAG_RST: P1.10 R5.1 U2.63 | length 718.3
  Top Layer w10: U2.63 597.43,1294.42 637.65,1334.65 806.78,1334.65 898.46,1426.33 898.46,1603.83 P1.10 899.96,1647.99 899.96,1686.49 921.89,1708.42 R5.1
JTAG_TCLK: P1.4 U2.62 | length 698.1
  Top Layer w10: U2.62 617.11,1207.64 627.91,1196.85 894.11,1196.85 996.06,1298.8 996.06,1475.75 1027.36,1507.05 P1.4
JTAG_TDI: P1.8 U2.61 | length 566.8
  Top Layer w10: U2.61 636.8,1281.4 666.42,1311.02 817.21,1311.02 923.78,1417.59 923.78,1546.46 956.65,1579.33 P1.8
JTAG_TDO: P1.6 U2.58 | length 500.7
  Top Layer w10: U2.58 696.63,1246.12 696.63,1277.3 711.09,1291.76 826.24,1291.76 943.78,1409.3 943.78,1507.73 P1.6
JTAG_TMS: P1.2 R4.1 U2.64 | length 878
  Top Layer w10: U2.64 577.74,1196.85 617.11,1157.48 854.33,1157.48 v1(870.08,1141.73) ; P1.2 1047.59,1470.12 1047.59,1456.03 1082.68,1420.94 ; v1(1082.68,1358.27) 1082.68,1420.94 ; R4.1 1136.22,1420.94 1082.68,1420.94
  Bottom Layer w10: v1@862.2,1149.61 874.02,1149.61 v1(1082.68,1358.27) v1@1086.61,1358.27
LDO_BYP: C4.2 LDO1.4 | length 124.1
  Bottom Layer w10: LDO1.4 948.83,763.02 955.12,756.73 966.15,756.73 1015.73,707.16 C4.2
LDO_EN: C7.2 LDO1.1 R1.1 R2.2 | length 283.2
  Bottom Layer w10: R1.1 R2.2 652.2,688.98 712.2,688.98 C7.2 766.57,691.77 798.83,724.03 LDO1.1
Net*_4: *.4@600.85,200.79 R13.1 | length 88.3
  Bottom Layer w10: *.4@590.55,200.79 654.79,200.79 660.77,194.8 663.79,194.8 670.54,188.06 670.54,185.04 R13.1
Net*_6: *.6@594.94,145.28 U2.37 | length 1170.8
  Top Layer w10: v1(623.41,86.61) 751.95,215.16 754.45,215.16 769.09,229.8 769.09,232.3 1027.87,491.08 1027.87,920.94 998.75,950.07 U2.37
  Bottom Layer w10: *.6@594.94,151.18 594.94,110.08 618.41,86.61 v1(623.41,86.61)
Net*_9: *.9 C15.2 | length 114.6
  Bottom Layer w10: C15.2 492.21,75.85 492.21,112.44 522.49,112.44 523.13,113.08 526.51,113.08 534.12,120.7 534.12,124.08 535.81,125.76 535.81,151.1 *.9@535.89,151.18
Net*_14: *.14 U2.38 | length 1536.3
  Top Layer w10: v1(393.7,74.8) 561.45,74.8 589.64,46.61 639.98,46.61 1055.12,461.76 1055.12,929.13 1014.5,969.75 U2.38
  Bottom Layer w10: v1(393.7,74.8) 409.45,74.8 437.46,102.82 *.14@437.46,151.18
Net*_17: *.17 U2.33 | length 1163.4
  Top Layer w10: v1(322.83,228.35) 322.83,298.82 312.52,309.14 312.52,370.69 330.87,389.05 585.9,389.05 951.76,754.91 U2.33
  Bottom Layer w10: v1(322.83,228.35) 328.33,228.35 355.89,200.79 *.17@413.39,200.79
Net*_18: *.18 U2.34 | length 1188.5
  Top Layer w10: v1(342.52,358.27) 601.36,358.27 1007.87,764.78 1007.87,877.95 994.81,891.01 U2.34
  Bottom Layer w10: v1@346.46,354.33 346.46,255.91 381.89,220.47 *.18@413.39,220.47
Net*_19: *.19 U2.32 | length 910.2
  Top Layer w10: v1@380.77,419.05 424.36,419.05 432.46,410.94 572.36,410.94 873.02,711.6 U2.32
  Bottom Layer w10: v1@374.01,419.05 374.01,255.91 389.76,240.16 *.19@413.39,240.16
  other v1: 371.92,419.05
Net*_20: *.20 U2.31 | length 765.5
  Top Layer w10: v1(444.88,440.94) 547.87,440.94 853.33,746.4 U2.31
  Bottom Layer w10: *.20@413.39,270 413.39,343.03 445.84,375.48 v1@445.84,440.94
NetF1_2: F1.2 Q1.2 | length 145.9
  Bottom Layer w10: Q1.2@239.25,1121.88 Q1.2
  Bottom Layer w15.75: F1.2 203.65,1157.48 Q1.2@239.25,1121.88
NetTEST_CANRX1_1: CANRX1.1 U2.6 U4.4 | length 517.9
  Top Layer w10: U4.4 168.76,1319.54 196.54,1291.76 196.54,1216.13 255.18,1157.48 ; CANRX1.1@235.5,1137.8 255.18,1157.48 ; U2.6 344.48,1068.18 255.18,1157.48
NetTEST_CANTX1_1: CANTX1.1 U2.5 U4.1 | length 688.3
  Top Layer w10: U4.1 174.08,1469.54 216.54,1427.09 216.54,1224.41 267.72,1173.23 ; CANTX1.1 305.12,1208.66 269.68,1173.23 267.72,1173.23 ; U2.5 464.99,1087.86 458.37,1094.49 346.46,1094.49 267.72,1173.23
NetU2_1: U2.1
NetU2_2: U2.2
NetU2_3: U2.3
NetU2_4: U2.4
NetU2_14: U2.14
NetU2_15: U2.15
NetU2_16: U2.16
NetU2_17: U2.17
NetU2_18: U2.18
NetU2_19: U2.19
NetU2_20: U2.20
NetU2_21: U2.21
NetU2_22: U2.22
NetU2_23: U2.23
NetU2_24: U2.24
NetU2_25: U2.25
NetU2_26: U2.26
NetU2_27: U2.27
NetU2_28: U2.28
NetU2_29: U2.29
NetU2_30: U2.30
NetU2_35: U2.35
NetU2_36: U2.36
NetU2_39: U2.39
NetU2_42: U2.42
NetU2_43: U2.43
NetU2_44: U2.44
NetU2_45: U2.45
NetU2_46: U2.46
NetU2_47: U2.47
NetU2_48: U2.48
NetU2_49: U2.49
NetU2_50: U2.50
NetU2_51: U2.51
NetU2_52: U2.52
NetU2_53: U2.53
NetU2_54: U2.54
NetU2_55: U2.55
NetU2_56: U2.56
NetU2_57: U2.57
NetU2_59: U2.59
NetU2_60: U2.60
OVP_G: C9.1 PNP1.3 Q2.1 R8.1 R12.2 | length 735.1
  Bottom Layer w10: Q2.1 657.52,1279.33 683.58,1253.27 ; R8.1 R12.2 681.1,1066.02 ; PNP1.3 617.95,921.26 619.92,921.26 681.1,982.44 681.1,1066.02 ; C9.1 683.58,1253.27 ; 681.1,1066.02 681.1,1162.53 715,1196.43 715,1254.65 704.23,1265.42 695.74,1265.42 683.58,1253.27
OVP_PNP_B: PNP1.1 R10.1 | length 184.1
  Bottom Layer w10: R10.1 468.94,912.95 508.31,873.58 PNP1.1
OVP_PNP_C: PNP1.2 R6.1 | length 184.7
  Bottom Layer w10: PNP1.2 R6.1
OVP_PULLUP: R7.1 R10.2 R11.2 | length 130
  Bottom Layer w10: R11.2 415.09,1069.43 416.53,1070.87 416.53,1067.99 418.49,1066.02 R10.2 R7.1
OVP_ZENER: D1.2 R11.1 | length 83.8
  Bottom Layer w10: D1.2 R11.1
PP_3V3: *.3@600.85,220.47 *.5@600.85,181.1 *.10 *.11 *.28 C1.2 C5.2 C6.2 C10.2 C13.2 C14.2 C23.2 C24.2 LDO1.3 P1.1 R4.2 R5.2 R13.2 R14.2 R15.2 R19.2 R20.2 R21.2 R22.2 U2.7 U2.8 U2.9 U2.41 | length 4756.1
  Top Layer w10: v1(259.84,165.35) 456.69,165.35 v3(492.13,200.79) ; C24.2@284.53,996.06 289.45,991.14 C24.2 ; C24.2@297.34,992.13 424.03,992.13 441.03,1009.12 U2.9 U2.8 ; U2.7 498.1,1047.59 498.1,1029.71 U2.8 ; R5.2 963.14,1748.72 1023.62,1809.2 1147.5,1809.2 1251.97,1704.72 1251.97,1675.02 C6.2 1171.28,1594.33 P1.1 1188.98,1576.12 R4.2 1188.98,1215.82 1050.12,1076.96 1050.12,1074.99 1037.4,1062.27 C23.2 1019.37,1062.27 994.58,1037.48 994.44,1037.48 985.76,1028.81 U2.41 729.6,1028.81 v2(728.35,1027.56) 727.1,1028.81 U2.8
  Top Layer w15: v3(492.13,200.79) 492.13,246.06 v1(572.83,326.77) 629.92,326.77 v2(933.07,629.92)
  Top Layer w20: v1(278.53,831.77) 278.53,834.48 248.99,864.02 248.99,987.4 257.65,996.06 C24.2@284.53,996.06
  Bottom Layer w10: v1(259.84,165.35) 301.75,165.35 R15.2 R14.2 ; v3(492.13,200.79) v3@496.06,196.85 ; *.11@496.52,151.18 496.44,151.26 v3@496.44,188.6 ; *.10@516.2,151.18 516.2,180.65 515.75,181.1 ; C13.2 C14.2 ; *.28@575.26,270 *.28 C13.2@575.26,324.35 ; R13.2 636.02,139.76 628.19,147.59 628.19,169.78 616.87,181.1 600.85,181.1 515.75,181.1 ; C10.2 660.51,241.39 642.89,241.39 621.98,220.47 600.85,220.47 519.69,220.47 v3@496.06,196.85 ; v3@496.06,196.85 496.44,196.47 v3@496.44,188.6 ; v3@496.44,188.6 503.94,181.1 515.75,181.1
  Bottom Layer w15: v1(572.83,326.77) C13.2@575.26,324.35 ; v2(728.35,1027.56) 896.37,859.54 918.02,859.54 C1.2 898.83,829.93 LDO1.3 898.83,660.23 v2@925.2,633.86
  Bottom Layer w20: R22.2 186.71,827.76 188.52,829.57 191.47,829.57 193.67,831.77 v1(278.53,831.77) 290.24,820.06 290.24,780.12 296.81,780.12 R21.2@295,778.3 ; R21.2 R21.2@295,778.3 ; R19.2 378.94,594.49 396.39,611.94 396.39,669.95 419.17,669.95 436.84,687.62 436.84,735.06 393.6,778.3 R21.2@295,778.3
PP_3V3_TMP: *.5@247.38,685.04 C16.2 C17.2 R22.1 | length 211.3
  Bottom Layer w10: C16.2 140.31,690.24 191.03,690.24 C17.2@191.86,689.41 ; R22.1 191.86,774.37 C17.2@191.86,689.41 ; *.5@247.38,685.04 246.99,684.65 197.41,684.65 C17.2 C17.2@191.86,689.41
PP_12V: C2.2 C3.2 LDO1.2 Q2.3 R1.2 | length 301.7
  Top Layer w30: v2(811.02,870.08) 811.02,880.9 823.4,893.28 823.4,894.27 v2(881.89,952.76)
  Bottom Layer w15: R1.2 741.89,800.94 v2(811.02,870.08)
PP_12V_FUSE_IN: F1.1 X1.1 | length 428.9
  Bottom Layer w23.62: F1.1 145.58,1829.5 X1.1
PP_12V_RVP_OUT: C8.2 C9.2 Q1.3 Q2.2 R3.2 R6.2 R7.2 R8.2 | length 255.7
  Bottom Layer w10: C8.2 359,1179.42 407.9,1179.42 R3.2 R7.2 R6.2 R8.2 R8.2@588.94,1181.34 ; C9.2@643.34,1223.99 C9.2 C9.2@645.08,1214.53
RVP_G: C8.1 Q1.1 R3.1 R9.2 | length 206.2
  Bottom Layer w10: Q1.1 280.18,1136.83 351.05,1136.83 C8.1 ; R9.2 C8.1 ; R3.1 357.88,1133.11 C8.1
SCL: *.15 R14.1 | length 93.1
  Bottom Layer w10: R14.1 406.16,118.11 417.7,129.65 417.7,148.23 417.78,148.31 *.15@417.78,151.18
SDA: *.16 R15.1 | length 67.3
  Bottom Layer w10: R15.1 357.78,176.1 361.59,176.1 366.59,181.1 *.16@413.39,181.1
SPLIT: C12.2 R16.2 R17.1 U4.5 | length 771.6
  Top Layer w10: v1(305.12,1539.37) 305.12,1345.83 328.81,1322.14 369.31,1322.14 U4.5 ; v1(610.24,1539.37) 668.36,1539.37 C12.2 669.29,1502.44 ; R17.1 636.25,1468.39 669.29,1501.43 669.29,1502.44 ; R16.2 703.35,1468.39 669.29,1502.44
  Bottom Layer w10: v1(305.12,1539.37) v1(610.24,1539.37)
STBY: R18.2 U4.8 | length 77.2
  Top Layer w10: U4.8 372.64,1469.54 378.94,1475.83 R18.2
TMP_SCL: *.1@316.67,710.63 R20.1 U2.11 | length 444.5
  Top Layer w10: v1(401.84,708.66) 401.84,720.9 398.97,723.77 413.39,738.19 413.39,948.63 434.51,969.75 U2.11
  Bottom Layer w10: *.1@316.67,710.63 316.76,710.55 316.89,710.68 318.91,708.66 v1(401.84,708.66) 388.07,708.66 386.05,710.68 385.83,710.46
TMP_SDA: *.6@247.38,710.63 R21.1 U2.12 | length 661.6
  Top Layer w10: v1(247.9,778.3) 247.9,742.88 344.3,646.48 382.08,646.48 432.09,696.48 432.09,937.99 444.16,950.07 U2.12
  Bottom Layer w10: *.6@247.38,710.63 247.38,734.92 247.9,735.43 v1(247.9,778.3)
VCC: C11.2 U4.3 | length 86.8
  Top Layer w10: C11.2 82.09,1369.54 U4.3
pads on no net: *.1@594.94,275.91 *.7 *.8 *.12 *.13 *.21 *.22 *.23 *.24 *.27 P1.7 P1.9 P1.MH1 P1.MH2 X1.5

## Polygon pours and split planes (outlines as drawn)
AGND on Bottom Layer "Bottom Layer-DGND" (solid, pour order 18): 1039.61,422.71 1039.61,425.43 1082.68,468.5 1082.68,2086.61 1287.4,2086.61 1287.4,0 0,0 0,1291.34 27.09,1291.34 893.83,424.6 1037.73,424.6
GND on Bottom Layer "Bottom Layer-GND" (solid, pour order 17): 0,2086.61 1082.68,2086.61 1082.68,468.5 1051.18,437.01 883.54,437.01 0,1320.55
PP_12V on Bottom Layer "Bottom Layer-PP_12V" (solid, pour order 14): 744.09,877.95 744.09,1129.92 744.1,1244.09 710.63,1277.56 677.17,1277.56 637.8,1311.02 570.87,1311.02 544.25,1337.64 544.25,1363.15 578.74,1397.64 787.4,1397.64 917.32,1267.72 917.32,1110.24 874.02,1066.93 874.02,818.9 874.02,751.97 858.27,736.22 842.52,736.22 826.77,751.97 826.77,795.28
no net on Bottom Layer "Bottom Layer-No Net 1" (solid, pour order 16): 1240.16,1228.43
PP_12V_RVP_OUT on Bottom Layer "Bottom Layer-PP_12V_RVP_OUT" (solid, pour order 12): 292.32,1299.21 543.31,1299.21 586.61,1255.91 606.3,1255.91 637.8,1224.41 582.68,1169.29 313.63,1169.29 239.87,1232.94 239.87,1265.42
PP_12V on Bottom Layer "Bottom Layer-PP_12V 1" (solid, pour order 13): 771.65,1101.34 786.1,1115.78 771.65,1130.23
AGND on Top Layer "TopLayer-DGND" (solid, pour order 20): 459.79,858.63 466.97,851.46 533.79,851.46 535.58,853.24 535.58,1013.52 536.65,1012.44 913.39,1012.44 918.89,1006.94 918.89,833.57 712.6,627.29 712.68,605.75 893.83,424.6 1037.73,424.6 1082.68,469.55 1082.68,2086.61 1287.4,2086.61 1287.4,0 0,0 0,1291.34 27.09,1291.34
GND on Top Layer "Top Layer-GND" (solid, pour order 19): 0,2086.61 1070.87,2086.61 1070.87,1128.23 996.68,1054.05 266.5,1054.05 0,1320.55
PP_3V3 on Top Layer "Top Layer-PP_3V3" (solid, pour order 15): 295.51,1055.12 472.44,1055.12 472.44,1022.79 440.8,991.14 289.45,991.14 273.09,1007.51 273.09,1032.69

## Other copper
Top Layer:
  pour cut-out: 944.6,1684.79 972.21,1712.4 1148.93,1535.68 1121.32,1508.07
Bottom Layer:
  pour cut-out: 944.12,1684.79 971.73,1712.4 1148.46,1535.68 1120.84,1508.07

## Silkscreen, mask and mechanical layers (free items; w line width, h text height)
Bottom Overlay:
  text "a" at 1653.54,2043.31 h748.03 r90
  text "Design by: Non Wajanakunakorn" at 1178.81,1842.52 h55.12 r90
  text "Elena Postupalskaya" at 1258.18,1258.18 h55.12 r90